# Altium PCB DoubleSPF5043Z.PcbDoc
Units mm, origin at the board's own origin, x right, y up, seen from the top; angles counter-clockwise.
Board outline 70.03 x 55 mm, 2 copper layers (Top Layer, Bottom Layer); 12 components, 8 nets, 38 pads, 307 vias.
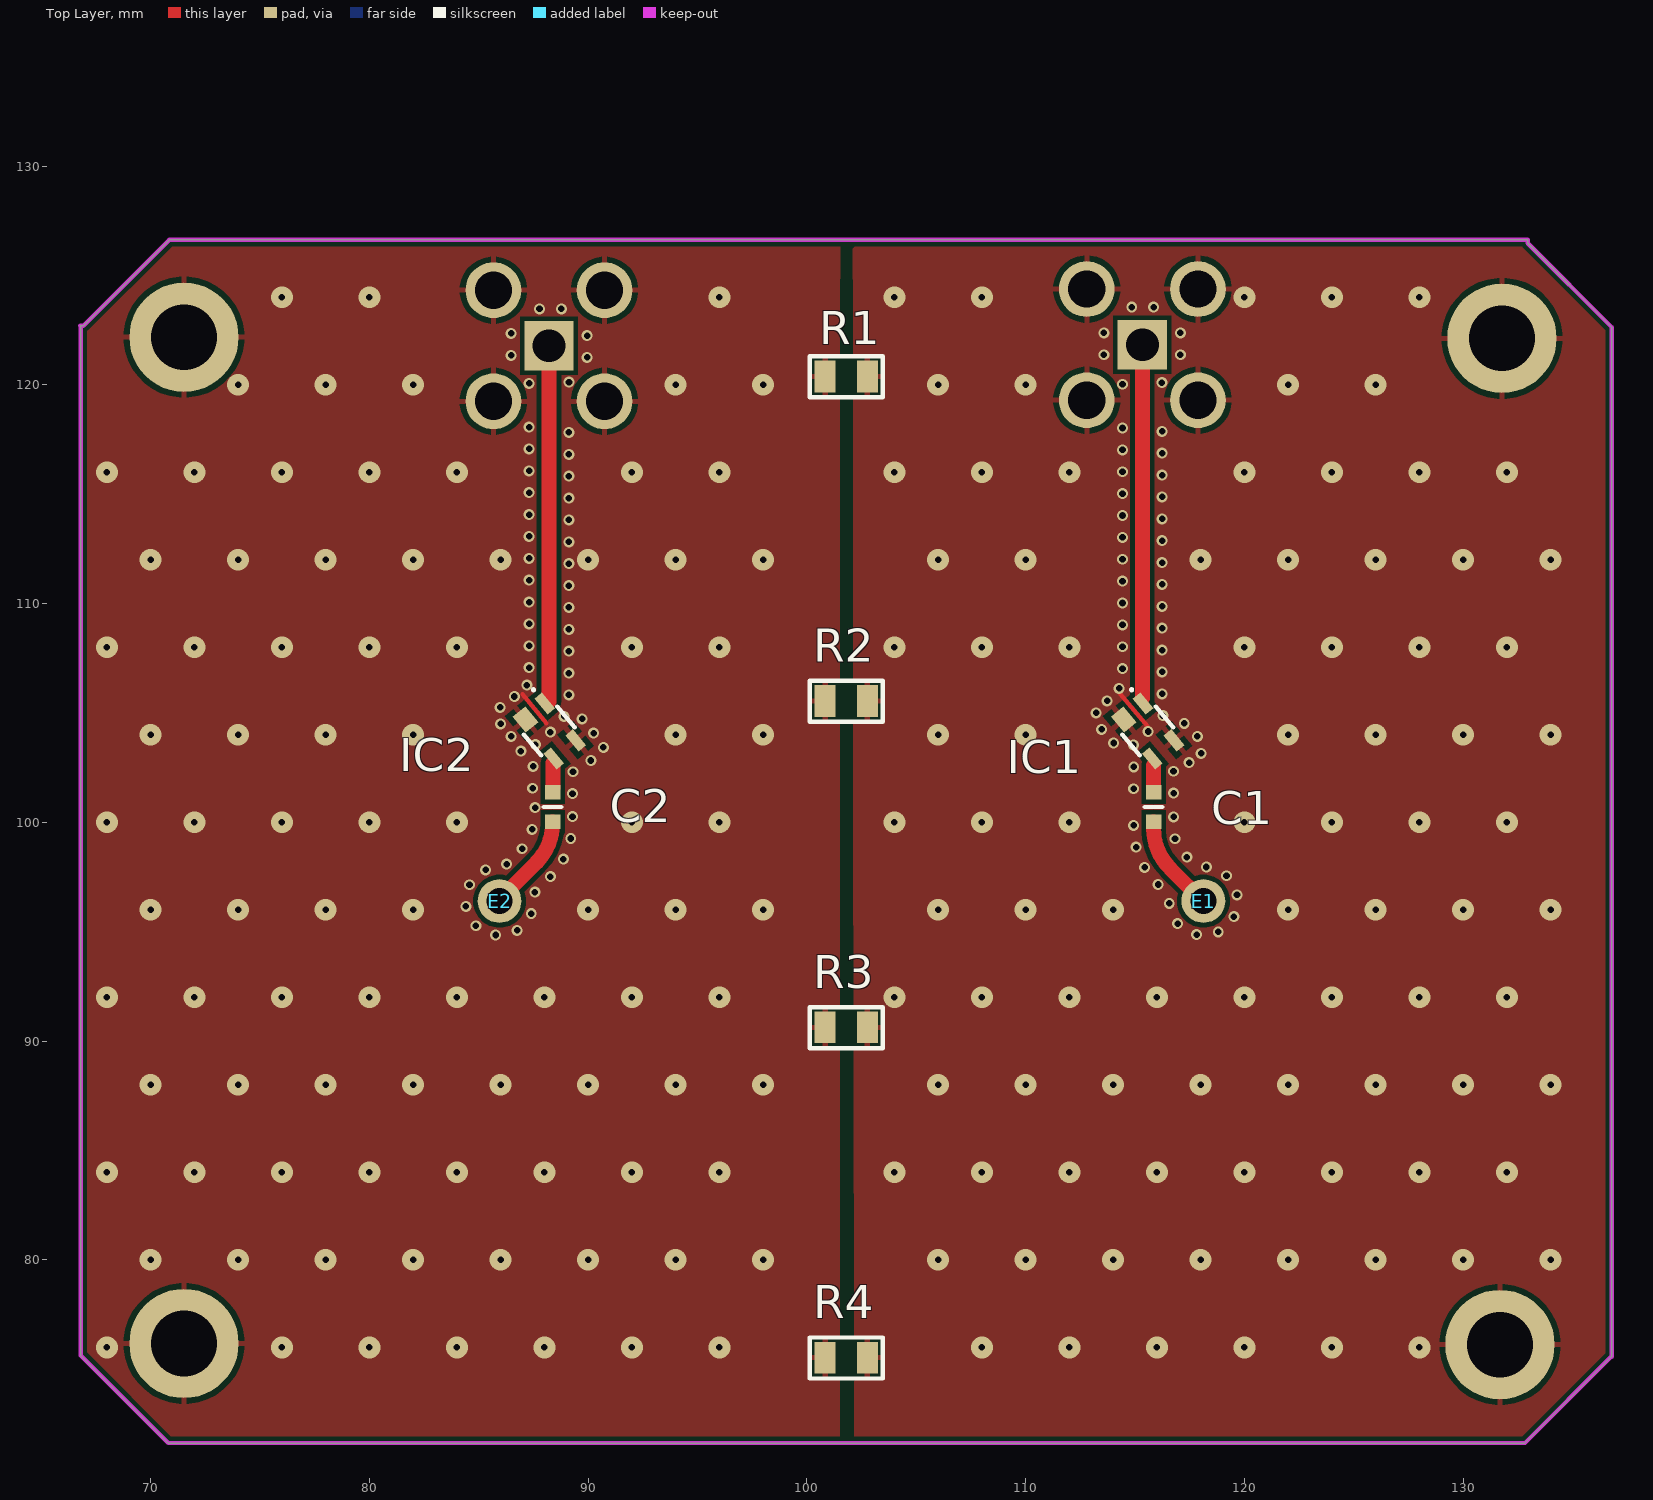
[diagram p0: Top Layer view]
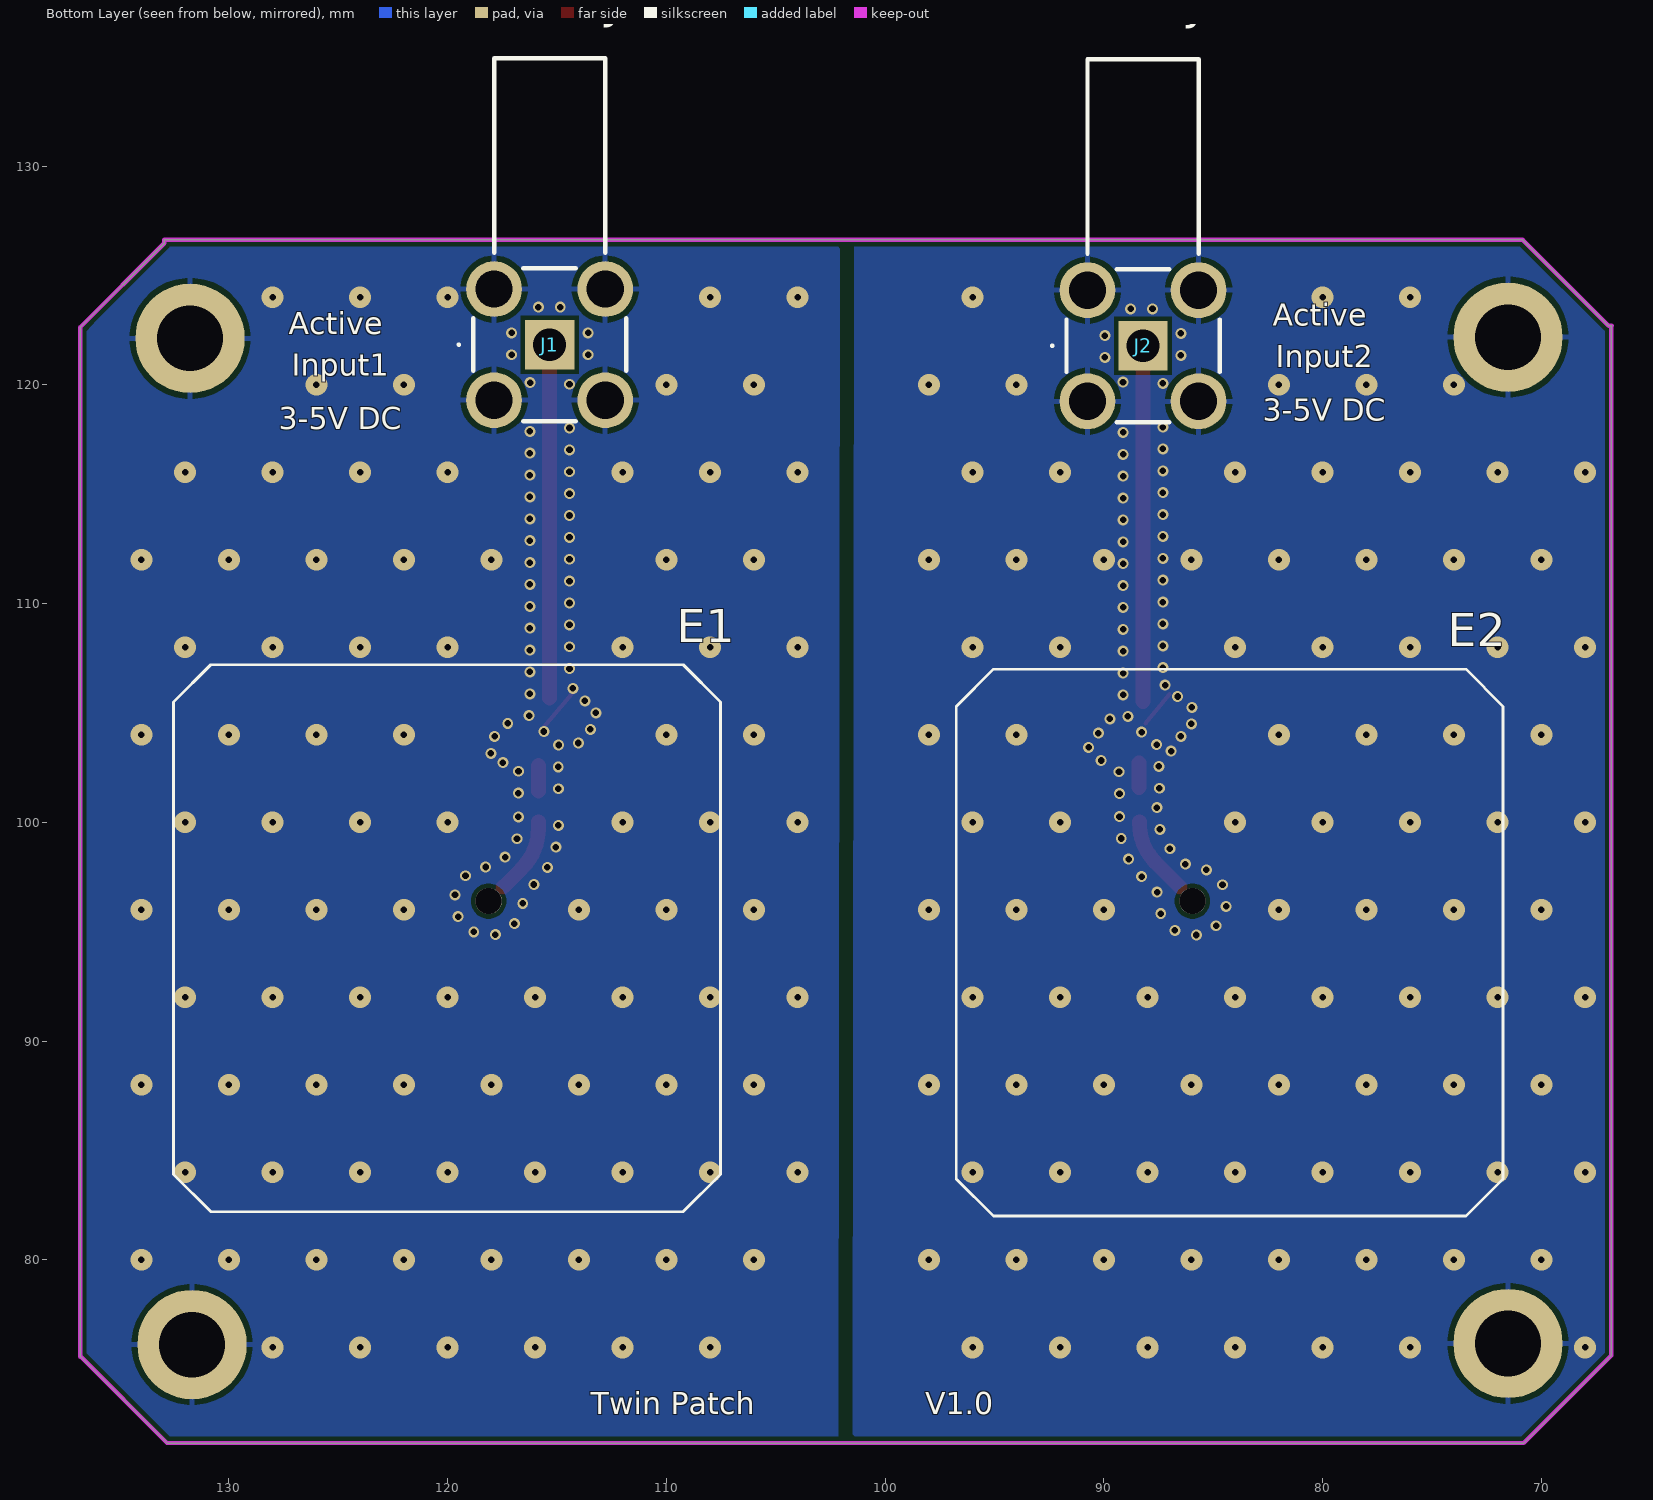
[diagram p1: Bottom Layer view, seen from below]
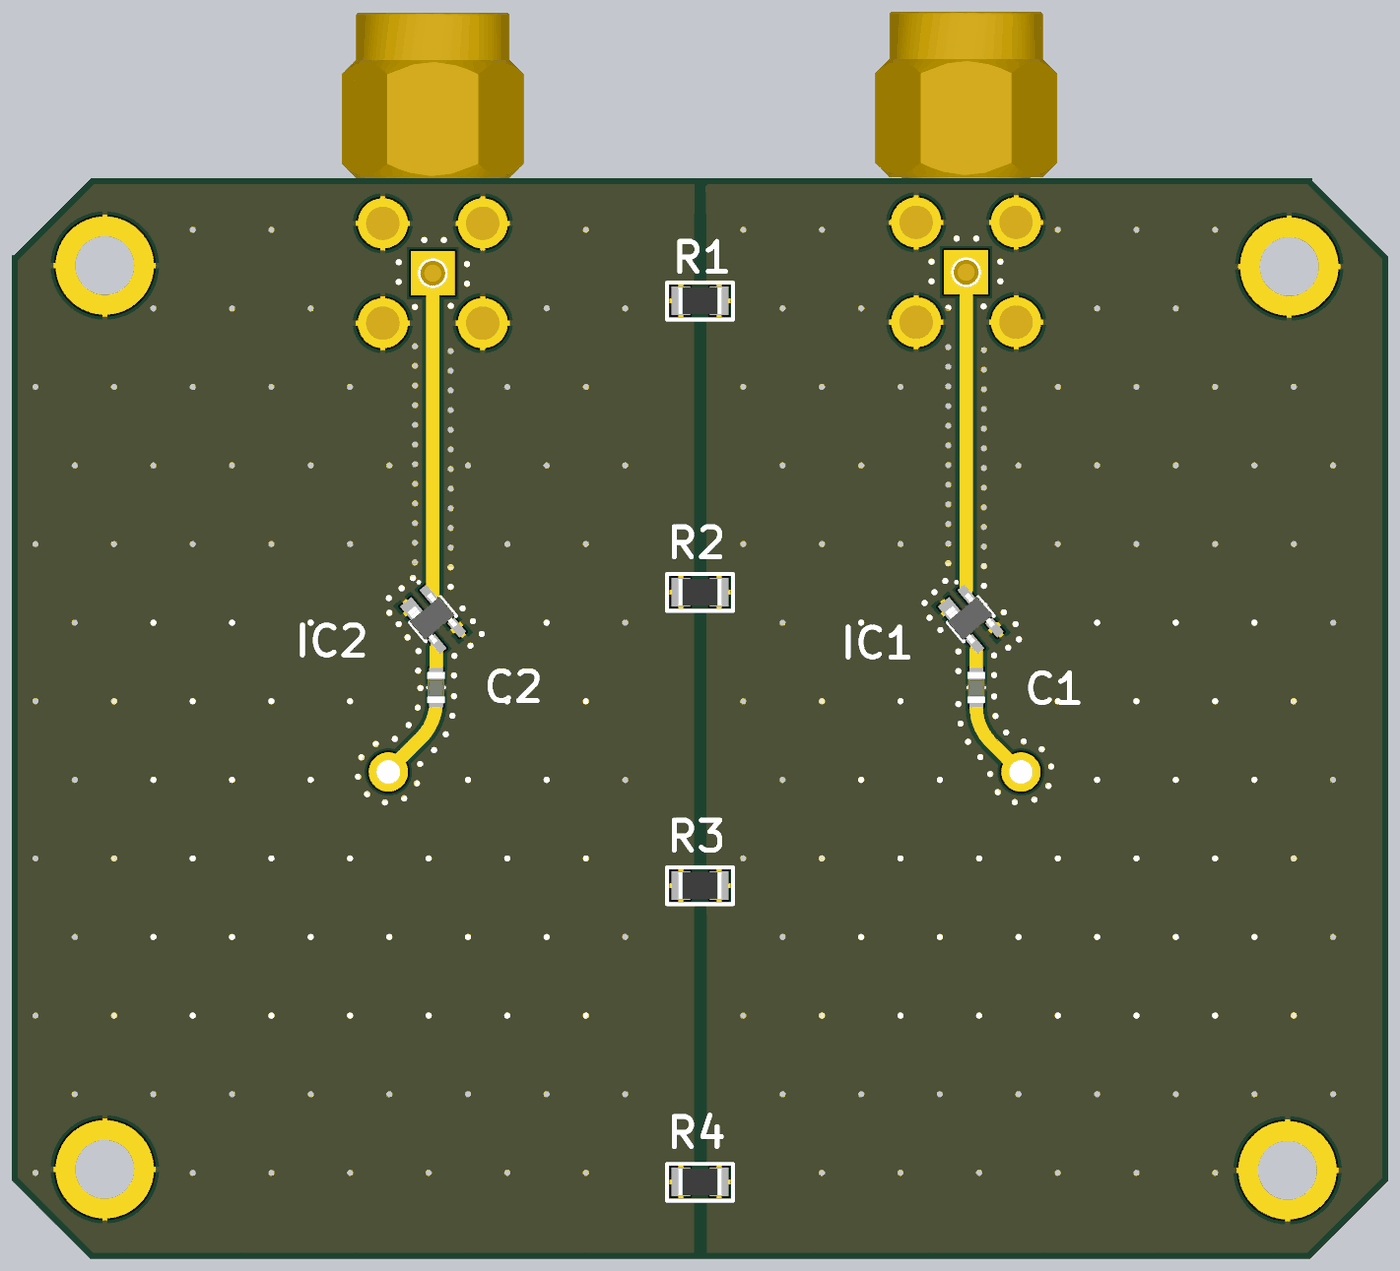
[diagram p2: 3D render of the assembled board from above, using the file's embedded part models]
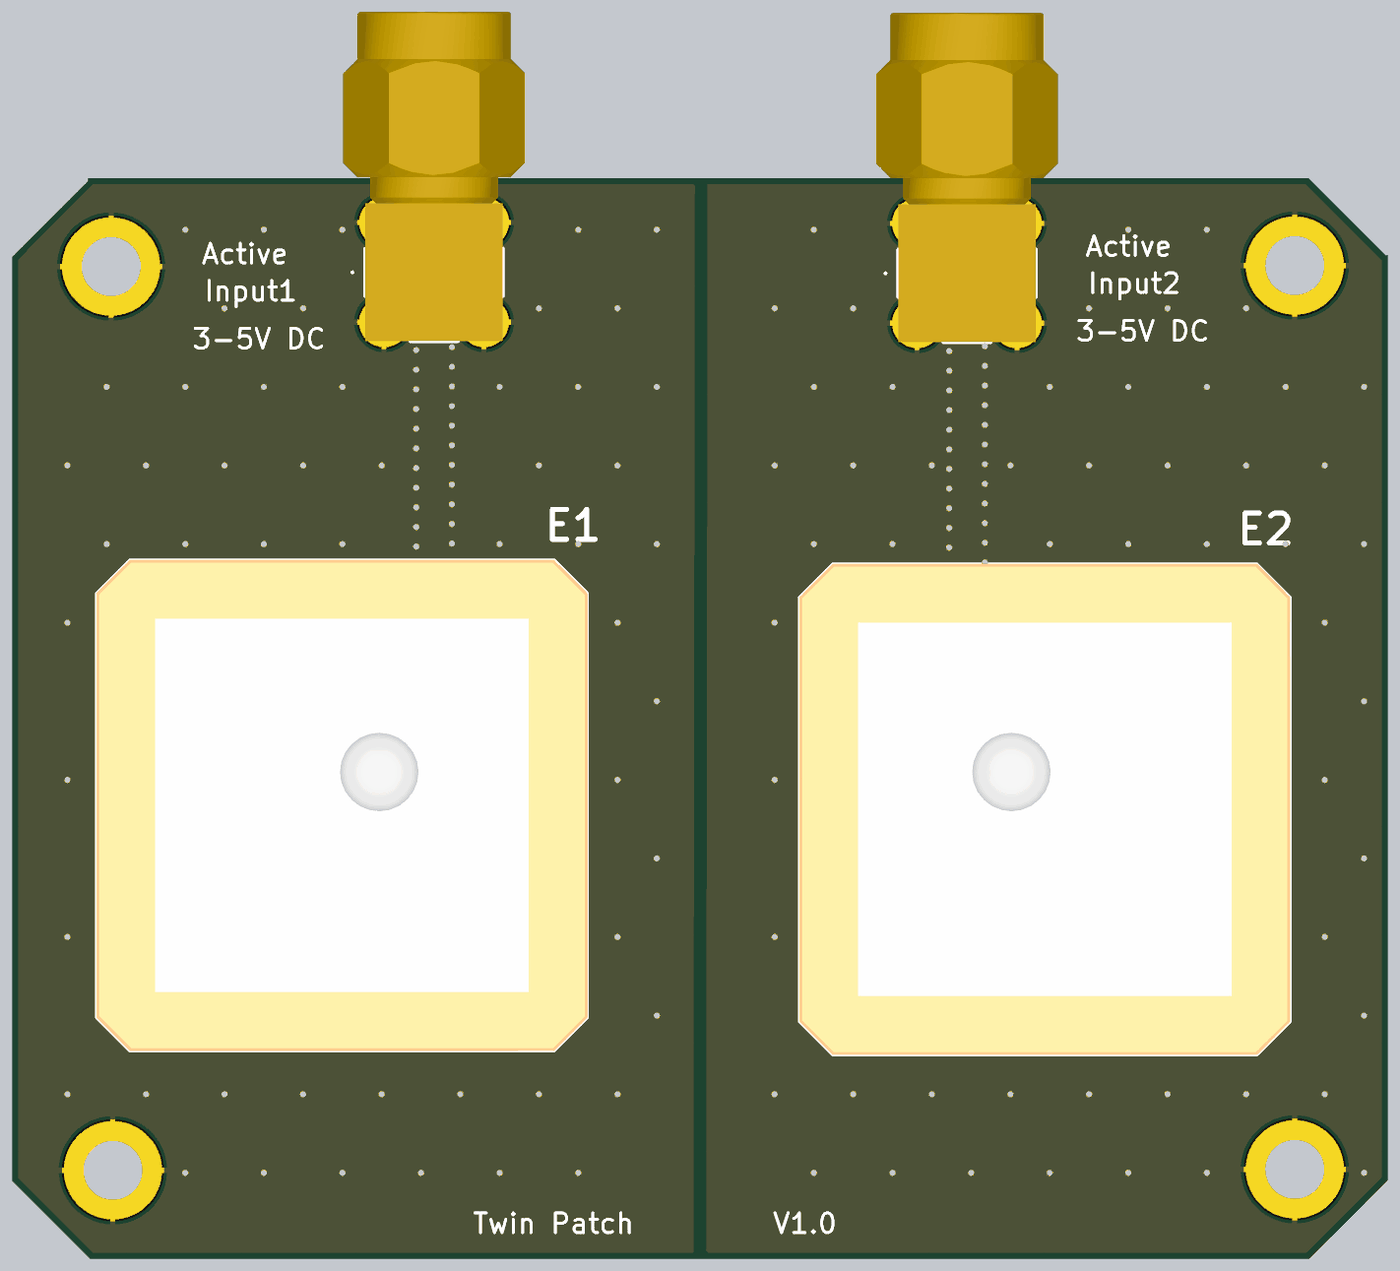
[diagram p3: 3D render of the assembled board from below, using the file's embedded part models]

## Layer stack, top to bottom
Top Solder: solder mask 0.0102, Solder Resist, Dk 3.5
Top Layer: signal copper 0.0356
Dielectric 1: dielectric 0.32, FR-4, Dk 4.8
Bottom Layer: signal copper 0.0356
Bottom Solder: solder mask 0.0102, Solder Resist, Dk 3.5

## Board outline
66.8,75.625 66.8,122.675 66.775,122.7 66.925,122.7 70.85,126.625 132.95,126.625 132.95,126.475 136.8,122.625 136.8,75.575 136.775,75.575 132.825,71.625 70.8,71.625

## Design rules (kind name [scope] priority, off if disabled: settings)
Clearance [All] p1: gap=0.2 ignorepadtopadclearanceinfootprint=FALSE
PolygonConnect [All] p1: thpad.connectstyle=Relief thpad.reliefconductorwidth=0.254 thpad.reliefentries=4 thpad.polygonreliefangle="90 Angle" thpad.airgapwidth=0.254 smdpad.connectstyle=Relief smdpad.reliefconductorwidth=0.254 smdpad.reliefentries=4 smdpad.polygonreliefangle="90 Angle" smdpad.airgapwidth=0.254 via.connectstyle=Direct via.reliefconductorwidth=0.254 via.reliefentries=4 via.polygonreliefangle="90 Angle" via.airgapwidth=0.254
RoutingVias [All] p1: holewidth=0.711 width=1.27 viastyle="Through Hole" minholewidth=0.711 minwidth=1.27 maxholewidth=0.711 maxwidth=1.27
SolderMaskExpansion [All] p1: expansion=0.102 istentingtop=FALSE
SupplyNets "Schematic Supply Nets_1" [InNet('GND1')] p1: voltage=0.000
SupplyNets "Schematic Supply Nets" [InNet('GND2')] p2: voltage=0.000
Width [All] p1: maxlimit=0.68 minlimit=0.68 preferedwidth=0.68
30 further rules are at their usual default settings.

## Components (designator, comment, footprint, x,y, rotation, side; value= is the part's Value field where it differs from the comment)
C1 "100pF" GRM1885C1H101JA01D 115.85,100.7 r270 top
C2 "100pF" GRM1885C1H101JA01D 88.375,100.7 r270 top
E1 "YFGC025WWD" XDCR_YFGC025WWD 120.025,94.7 r0 bottom
E2 "YFGC025WWD" XDCR_YFGC025WWD 84.25,94.5 r270 bottom
IC1 "SPF5043Z" SPF5043Z 115.575,104.175 r220 top
IC2 "SPF5043Z" SPF5043Z 88.225,104.175 r220 top
J1 "SMA-RA" 132135 115.335,121.835 r180 bottom
J2 "SMA-RA" 132135 88.21,121.785 r180 bottom
R1 "0" RESC0805X05N 101.8,120.375 r180 top
R2 "0" RESC0805X05N 101.8,105.55 r180 top
R3 "0" RESC0805X05N 101.8,90.625 r180 top
R4 "0" RESC0805X05N 101.8,75.525 r180 top

## Footprints (in the part's own frame and the unit in brackets; to place one, negate y for a bottom-side part, rotate by r counter-clockwise, add the part's x,y. Pads: shape width x height; smd on the part's side, far side on the other; paste and mask are expansions set on the pad)
132135 [mm]
  rect 2.25x2.25 hole 1.5: 1(0,0)
  round 2.55 hole 1.7: 2(-2.54,-2.54) 3(-2.54,2.54) 4(2.54,-2.54) 5(2.54,2.54)
  silkscreen extent -4.2,-3.5 3.5,13.1, body extent -4.62,-3.5 4.62,13.25, height 10.82
GRM1885C1H101JA01D [mm]
  rect 0.65x0.7 smd: 1(-0.675,0) 2(0.675,0)
  silkscreen extent 0,-0.4 0,0.4, body extent -0.8,-0.45 0.8,0.45, height 0.8
RESC0805X05N [mm] "Chip Resistor, 2-Leads, Body 2.00x1.25mm, IPC Medium Density"
  rect 0.95x1.45 smd: 1(-0.975,0) 2(0.975,0)
  silkscreen extent -1.68,-0.92 1.68,0.95, body extent -1.1,-0.67 1.1,0.68, height 0.5
SPF5043Z [mm]
  rect 0.45x0.95 smd: 1(-0.65,-1.1) 3(0.65,1.1) 4(-0.65,1.1)
  rect 0.75x0.95 smd: 2(0.5,-1.1)
  silkscreen extent -1,-1.93 1,0.62, body extent -1,-1.11 1,0.99, height 0.89
XDCR_YFGC025WWD [mm]
  round 2 smd far side paste-2: 1(-1.9,-1.7)
  round 1.2 hole 1.2 unplated: ""(-1.9,-1.7)
  silkscreen extent -12.5,-12.5 12.5,12.5, body extent -12.5,-12.5 12.5,12.5, height 4.7

## Part data
C1 C2: library part GRM1885C1H101JA01D, "Capacitor", Manufacturer_Name="Murata Electronics", Mouser Part Number=81-GRM39C101J50, Arrow Part Number=GRM1885C1H101JA01D, Arrow Price/Stock=https://www.arrow.com/en/products/grm1885c1h101ja01d/murata-manufacturing?region=europe, Datasheet Link=https://search.murata.co.jp/Ceramy/image/img/A01X/G101/ENG/GRM1885C1H101JA01-01A.pdf, Height=0.9mm, Manufacturer_Part_Number=GRM1885C1H101JA01D, Mouser Price/Stock=https://www.mouser.co.uk/ProductDetail/Murata-Electronics/GRM1885C1H101JA01D?qs=H3lwsW1hsDt1I4guwPQ00A%3D%3D
E1 E2: Package=None, Availability=Unavailable, MP=YFGC025WWD, PRICE=None
IC1 IC2: "Integrated Circuit", Manufacturer_Name=Qorvo, Mouser Part Number=772-SPF5043Z, Datasheet Link=https://www.qorvo.com/products/d/da001897, Manufacturer_Part_Number=SPF5043Z, Mouser Price/Stock=https://www.mouser.co.uk/ProductDetail/Qorvo/SPF5043Z?qs=p6lVfQR1GSoUob90DTnCEA%3D%3D
J1 J2: library part 132135, "Connector", Manufacturer_Name=Amphenol, Mouser Part Number=523-132135, Arrow Part Number=132135, Arrow Price/Stock=https://www.arrow.com/en/products/132135/amphenol, Datasheet Link=https://s3-us-west-2.amazonaws.com/catsy.582/132135.pdf, Height=10.26mm, Manufacturer_Part_Number=132135, Mouser Price/Stock=https://www.mouser.co.uk/ProductDetail/Amphenol-RF/132135?qs=b8dDPpdgesuISdo6zUNLtg%3D%3D
R1 R2 R3 R4: library part Resistor2P, "The resistors have 2PIN in AXIAL and SMD models. / All wattage include in.", Create Date=2022/07/24, Modified Date=2025/03/01, Version=1.3

## Free pads (board coordinates)
  round 5 hole 3: 1(71.525,76.175) 1(71.525,122.175) 1(131.682,76.125) 1(131.774,122.125)

## Via types
v1: diameter 1/1 (per signal layer), hole 0.3, Top Layer to Bottom Layer, tented both sides, 177 vias
v2: diameter 0.5, hole 0.3, Top Layer to Bottom Layer, tented both sides, 130 vias

## Nets (pads, with @x,y where several pads share a name; then routed paths per layer and width w, separated by ;. In a path a pad name is that pad's centre, name@x,y a point inside that pad or via, vN(x,y) a via of type N, cw(c..) or ccw(c..) an arc to the next point about the centre after c; other vN are vias at no path point)
GND1: IC1.2 IC1.4 J1.2 J1.3 J1.4 J1.5 pad.1@131.682,76.125 pad.1@131.774,122.125 R1.1 R2.1 R3.1 R4.1 | length 2
  Top Layer w0.2: 114.325,105.875 v2@115.575,104.375
  other v1: 108,76 112,76 116,76 120,76 124,76 128,76 106,80 110,80 114,80 118,80 122,80 126,80 130,80 134,80 104,84 108,84 112,84 116,84 120,84 124,84 128,84 132,84 106,88 110,88 114,88 118,88 122,88 126,88 130,88 134,88 104,92 108,92 112,92 116,92 120,92 124,92 128,92 132,92 106,96 110,96 114,96 122,96 126,96 130,96 134,96 104,100 108,100 112,100 120,100 124,100 128,100 132,100 106,104 110,104 122,104 126,104 130,104 134,104 104,108 108,108 112,108 120,108 124,108 128,108 132,108 106,112 110,112 118,112 122,112 126,112 130,112 134,112 104,116 108,116 112,116 120,116 124,116 128,116 132,116 106,120 110,120 122,120 126,120 104,124 108,124 120,124 124,124 128,124
  other v2: 117.812,94.867 118.804,94.992 116.948,95.37 119.52,95.69 116.565,96.294 119.662,96.68 116.06,97.157 119.181,97.556 115.435,97.938 118.265,97.956 117.374,98.41 115.053,98.862 116.828,99.248 114.939,99.856 116.761,100.246 116.761,101.334 114.939,101.533 116.757,102.334 114.943,102.533 117.475,102.725 118.025,103.15 114.921,103.533 114.025,103.625 117.85,103.925 115.6,104.15 113.475,104.25 117.25,104.525 116.274,104.874 113.225,105 113.725,105.55 116.242,105.873 114.275,106.125 116.242,106.873 114.428,107.025 116.242,107.873 114.428,108.025 116.242,108.873 114.428,109.025 116.242,109.873 114.428,110.025 116.242,110.873 114.428,111.025 116.242,111.873 114.428,112.025 116.242,112.873 114.428,113.025 116.242,113.873 114.428,114.025 116.242,114.873 114.428,115.025 116.242,115.873 114.428,116.025 116.242,116.873 114.428,117.025 116.242,117.873 114.428,118.025 114.428,120.025 116.225,120.1 113.575,121.375 117.075,121.375 113.575,122.375 117.075,122.375 114.85,123.55 115.85,123.55
GND2: IC2.2 IC2.4 J2.2 J2.3 J2.4 J2.5 pad.1@71.525,76.175 pad.1@71.525,122.175 R1.2 R2.2 R3.2 R4.2 | length 1.7
  Top Layer w0.2: 87,105.85 88.079,104.537
  other v1: 68,76 76,76 80,76 84,76 88,76 92,76 96,76 70,80 74,80 78,80 82,80 86,80 90,80 94,80 98,80 68,84 72,84 76,84 80,84 84,84 88,84 92,84 96,84 70,88 74,88 78,88 82,88 86,88 90,88 94,88 98,88 68,92 72,92 76,92 80,92 84,92 88,92 92,92 96,92 70,96 74,96 78,96 82,96 90,96 94,96 98,96 68,100 72,100 76,100 80,100 84,100 92,100 96,100 70,104 74,104 78,104 82,104 94,104 98,104 68,108 72,108 76,108 80,108 84,108 92,108 96,108 70,112 74,112 78,112 82,112 86,112 90,112 94,112 98,112 68,116 72,116 76,116 80,116 84,116 92,116 96,116 74,120 78,120 82,120 94,120 98,120 76,124 80,124 96,124
  other v2: 85.775,94.849 86.752,95.06 84.869,95.272 87.4,95.822 84.407,96.159 87.566,96.808 84.576,97.145 88.275,97.514 85.31,97.824 86.276,98.084 88.869,98.318 86.983,98.791 89.206,99.26 87.441,99.68 89.286,100.257 87.578,100.67 89.286,101.312 87.464,101.557 89.309,102.312 87.482,102.557 90.125,102.825 86.925,103.25 90.7,103.425 87.586,103.551 86.475,103.925 90.25,104.075 88.275,104.125 86,104.5 89.725,104.725 88.902,104.847 85.975,105.25 86.625,105.75 89.117,105.823 87.2,106.275 89.117,106.823 87.303,107.069 89.117,107.823 87.303,108.069 89.117,108.823 87.303,109.069 89.117,109.823 87.303,110.069 89.117,110.823 87.303,111.069 89.117,111.823 87.303,112.069 89.117,112.823 87.303,113.069 89.117,113.823 87.303,114.069 89.117,114.823 87.303,115.069 89.117,115.823 87.303,116.069 89.117,116.823 87.303,117.069 89.117,117.823 87.303,118.069 87.303,120.069 89.125,120.125 89.95,121.25 86.478,121.348 89.95,122.25 86.478,122.348 87.775,123.475 88.775,123.475
NetC1_2: C1.2 E1.1 | length 3.5
  Top Layer w0.68: C1.2 115.85,99.702 ccw(c118.39,99.702) 116.594,97.906 E1.1@117.462,97.037
NetC2_2: C2.2 E2.1 | length 3.6
  Top Layer w0.68: E2.1@86.523,97.048 87.628,98.153 ; 87.628,98.153 87.629,98.154 ccw(c85.833,99.951) 88.373,99.951 C2.2@88.373,100.023
NetIC1_1: IC1.1 J1.1 | length 16.2
  Top Layer w0.68: IC1.1@115.335,105.675 J1.1
NetIC2_1: IC2.1 J2.1 | length 16.3
  Top Layer w0.68: IC2.1@88.21,105.525 J2.1
RF_IN_01: C1.1 IC1.3 | length 1.2
  Top Layer w0.68: C1.1@115.85,101.425 IC1.3@115.85,102.6
RF_IN_02: C2.1 IC2.3 | length 1.1
  Top Layer w0.68: C2.1@88.389,101.589 IC2.3@88.389,102.71
pads on no net: E1. E2.

## Polygon pours and split planes (outlines as drawn)
GND2 on Top Layer "GND2_L01_P001" (solid, pour order 1): 101.607,71.644 70.969,71.644 70.969,71.519 67.019,75.869 66.919,122.744 71.119,126.619 101.532,126.695
GND1 on Top Layer "GND1_L01_P002" (solid, pour order 2): 102.087,126.475 132.875,126.475 132.875,126.6 136.825,122.25 136.925,75.375 132.725,71.5 102.163,71.424
GND2 on Bottom Layer "GND2_L02_P003" (solid, pour order 3): 101.488,71.6 70.575,71.6 70.575,71.475 66.625,75.825 66.525,122.7 70.725,126.575 101.413,126.651
GND1 on Bottom Layer "GND1_L02_P004" (solid, pour order 4): 102.062,126.45 132.75,126.45 132.75,126.575 136.7,122.225 136.8,75.35 132.6,71.475 102.137,71.399

## Keep-outs
Keep-Out Layer:
  the board outline again, w0.2

## Other copper
Top Layer:
  pour cut-out: 102.125,71.625 102.125,124.825 101.5,124.825 101.5,71.625

## Silkscreen, mask and mechanical layers (free items; w line width, h text height)
Bottom Overlay:
  text "Active" at 82.271,122.69 h1
  text "Active" at 127.25,122.3 h1
  text "Input2" at 82.146,120.799 h1
  text "Input1" at 127.125,120.408 h1
  text "3-5V DC" at 82.746,118.365 h1
  text "3-5V DC" at 127.725,117.975 h1
  text "V1.0" at 98.175,72.95 h1
  text "Twin Patch" at 113.45,72.95 h1
Top Solder:
  lines w0.68: 86.525,97.05 87.629,98.154 ; 88.21,105.525 88.21,121.785 ; 88.375,100.025 88.375,99.952 cw(c85.835,99.952) 87.631,98.156 87.63,98.155 ; 88.389,101.589 88.389,102.71 ; 115.335,105.675 115.335,121.835 ; 115.85,99.727 ccw(c118.39,99.727) 116.594,97.931 117.5,97.025 ; 115.85,101.375 115.85,102.625 ; 87.629,98.154 ccw(c87.15,98.637) 87.63,98.155